# Altium PCB Buck_converter.PcbDoc
Units mil, origin at the board's own origin, x right, y up, seen from the top; angles counter-clockwise.
Board outline 6000 x 3035 mil, 4 copper layers (Top Layer, Ground, Layer 2, Bottom Layer), stack 23.756 mil thick; 43 components, 22 nets, 133 pads, 33 vias.
Unrouted connection lines stored in the file: 5.
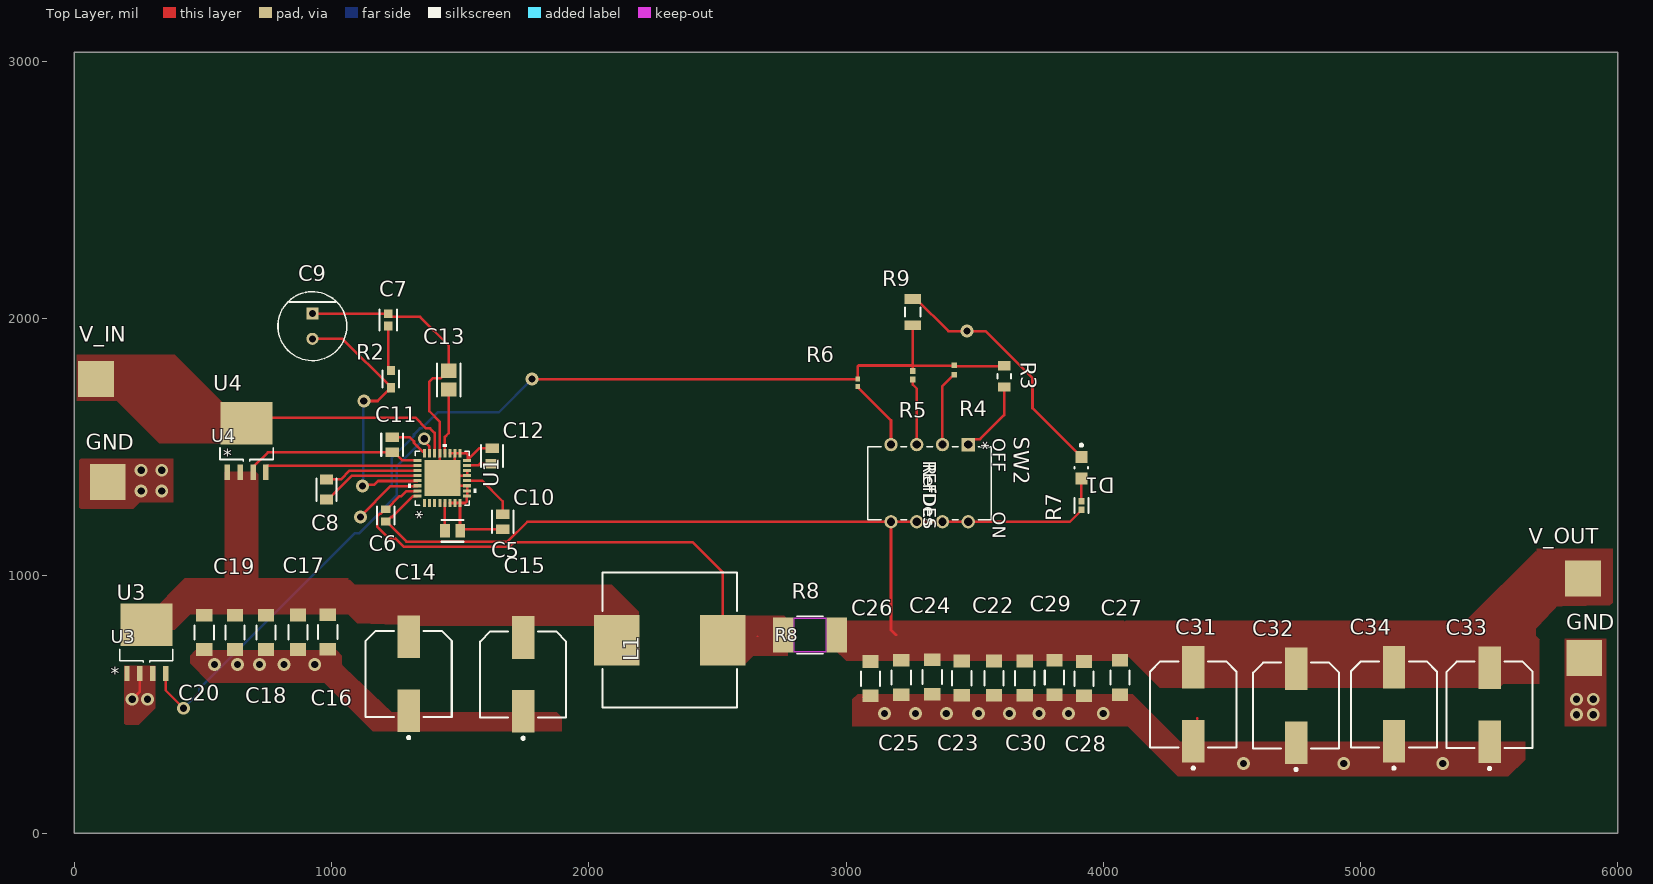
[diagram p0: Top Layer view]
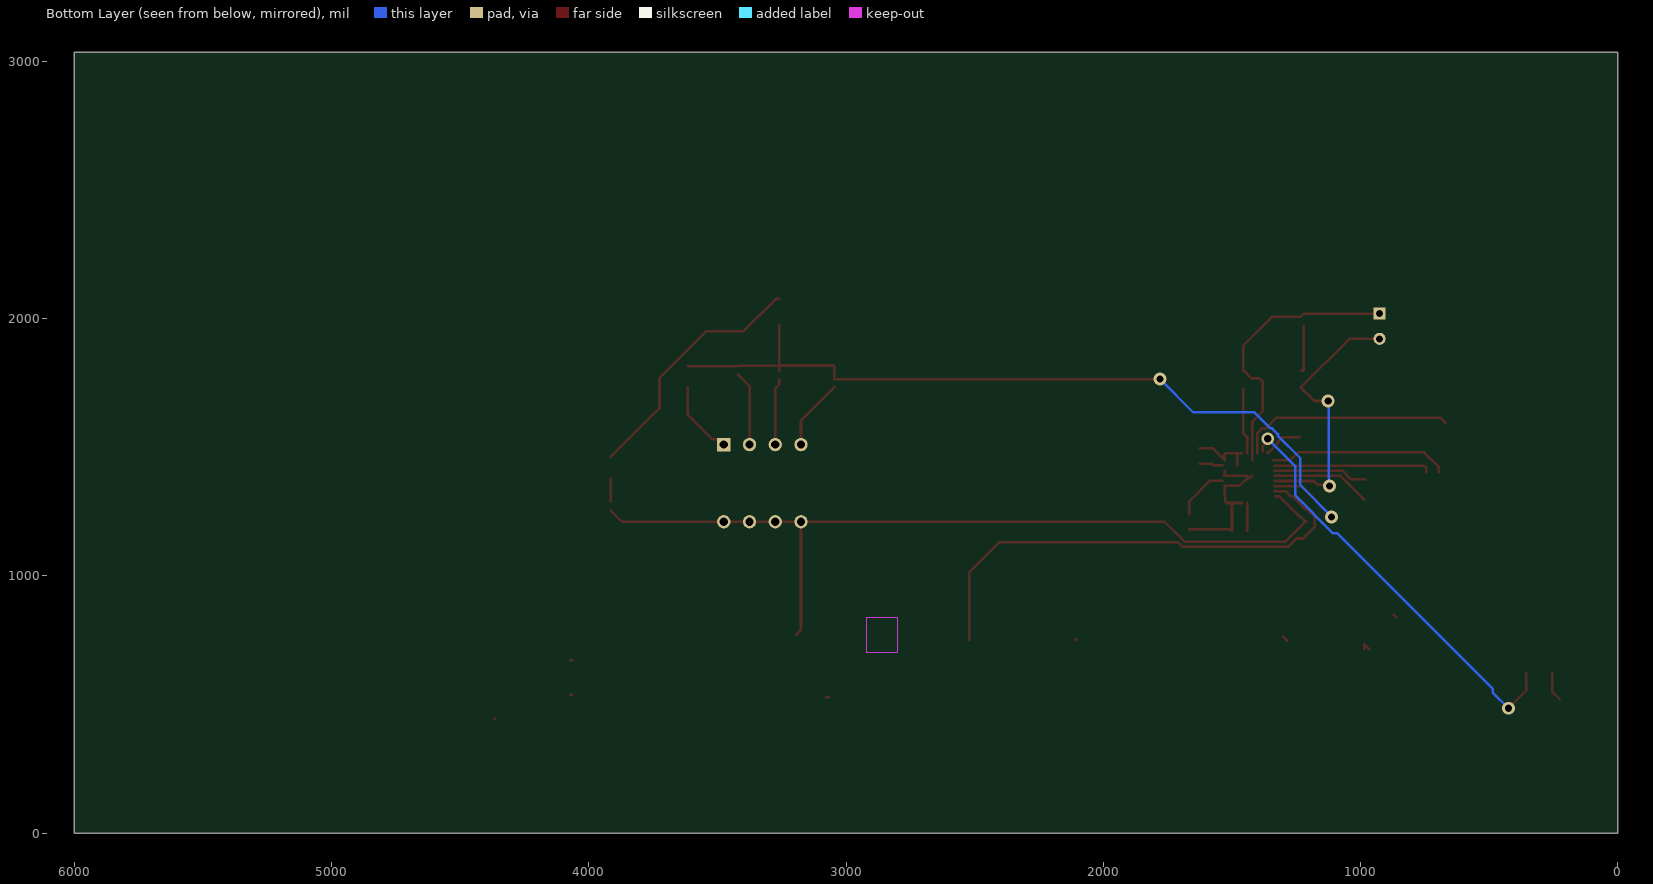
[diagram p1: Bottom Layer view, seen from below]
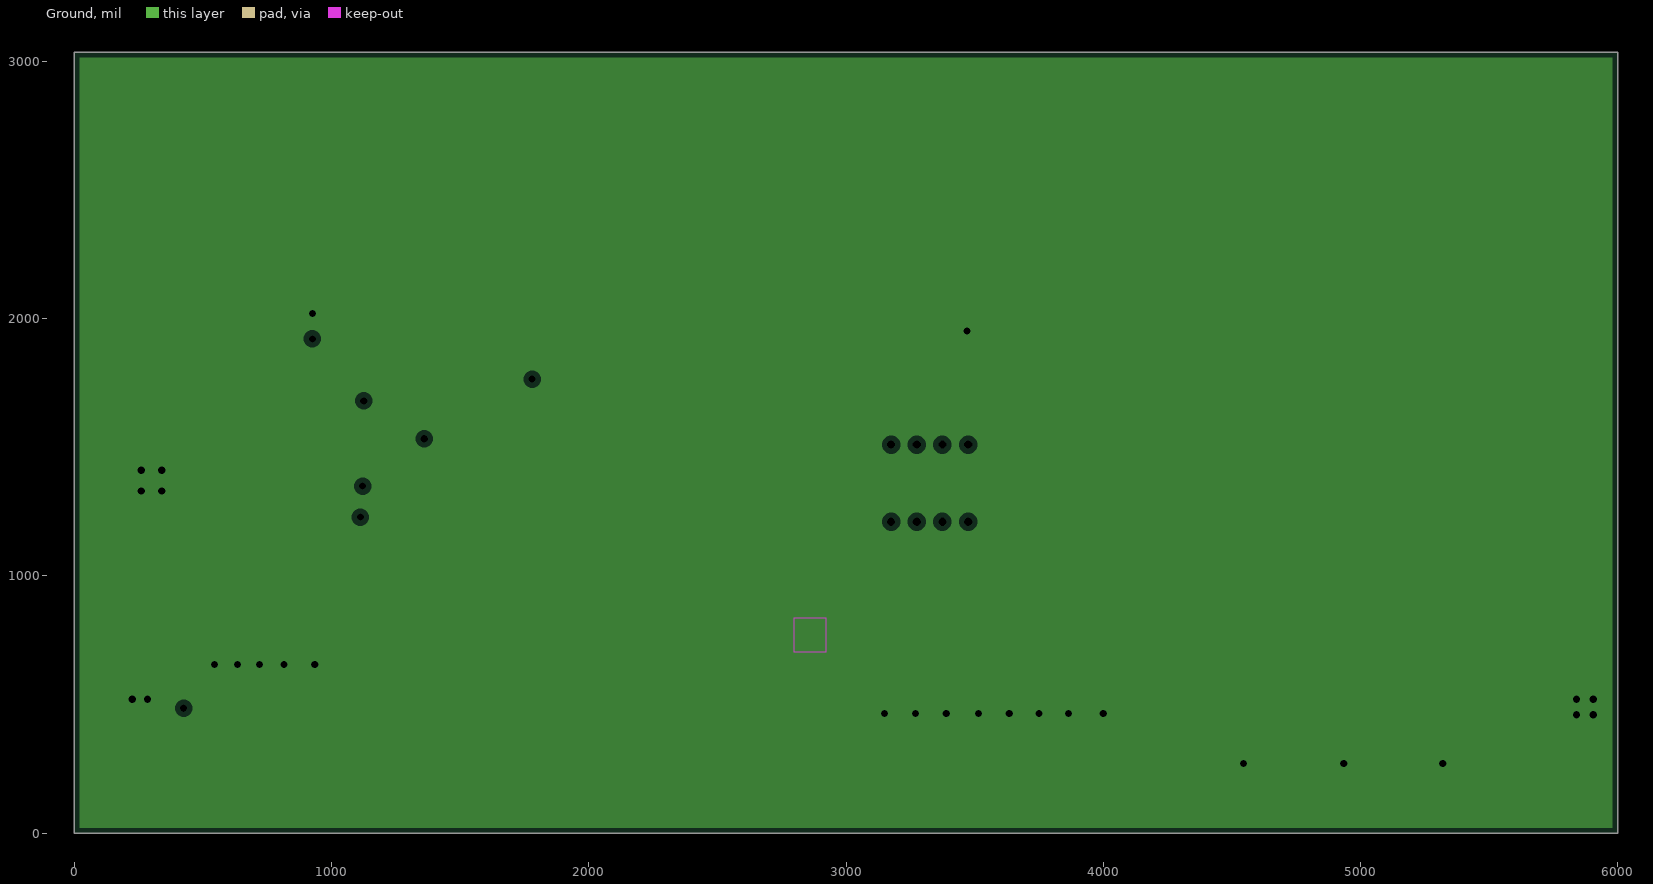
[diagram p2: Ground, clearances drawn from the general rule]
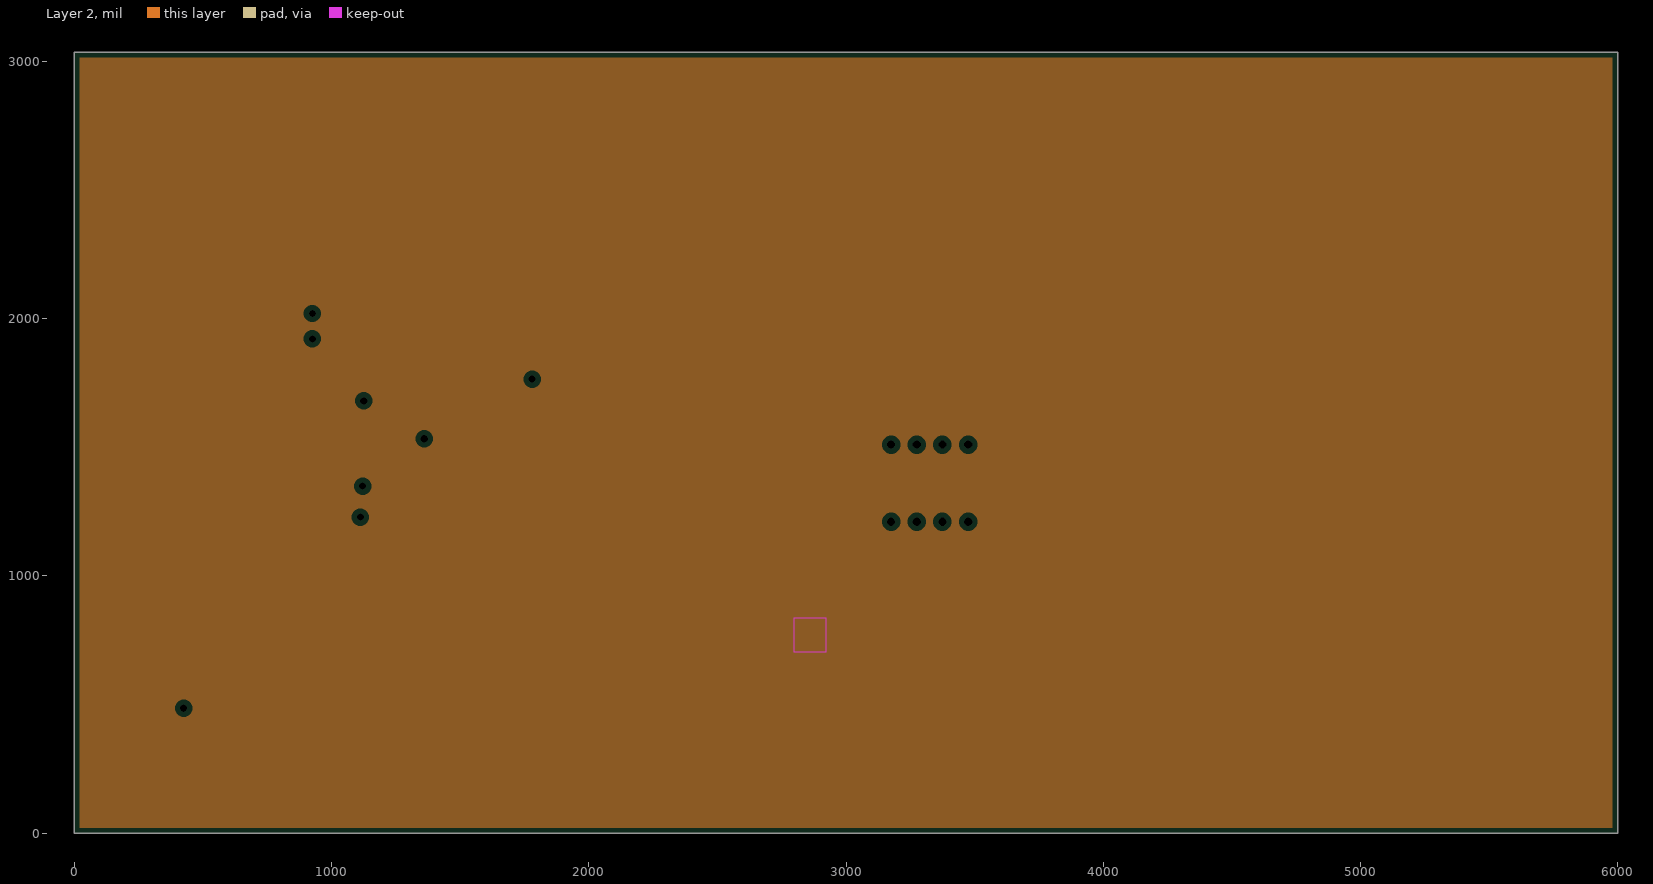
[diagram p3: Layer 2, clearances drawn from the general rule]
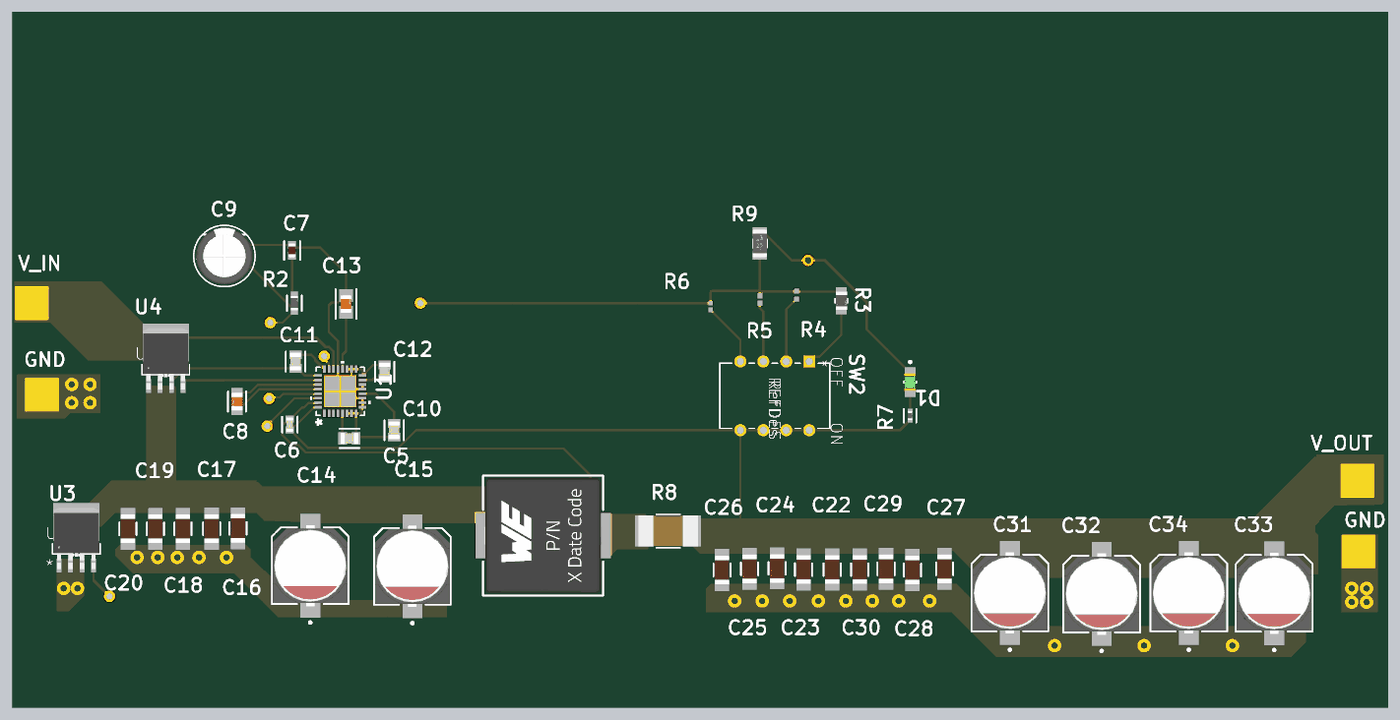
[diagram p4: 3D render of the assembled board from above, using the file's embedded part models]

## Layer stack, top to bottom
Top Solder: solder mask 0.4, Solder Resist, Dk 3.5
Top Layer: signal copper 1.4
Dielectric 2: prepreg 2.8, PP-006, Dk 4.1
Ground: plane copper 1.378, net GND
Dielectric 1: dielectric 12.6, FR-4, Dk 4.8
Layer 2: plane copper 1.378
Dielectric 3: prepreg 2.8, PP-006, Dk 4.1
Bottom Layer: signal copper 1.4
Bottom Solder: solder mask 0.4, Solder Resist, Dk 3.5

## Board outline
0,0 6000,0 6000,3035 0,3035

## Design rules (kind name [scope] priority, off if disabled: settings)
Clearance [All] p1: gap=10 ignorepadtopadclearanceinfootprint=FALSE
PlaneClearance [All] p1: clearance=20
PlaneConnect [All] p1: planeconnectstyle=Relief reliefexpansion=20 reliefentries=4 reliefconductorwidth=10 reliefairgap=10
PolygonConnect [All] p1: connectstyle=Direct reliefconductorwidth=10 reliefentries=4 polygonreliefangle="90 Angle" airgapwidth=10
RoutingVias [All] p1: holewidth=28 width=50 viastyle="Through Hole" minholewidth=28 minwidth=50 maxholewidth=28 maxwidth=50
SolderMaskExpansion [All] p1: expansion=4 istentingtop=FALSE
SupplyNets "Schematic Supply Nets" [InNet('GND')] p1: voltage=0.000
Width [All] p1: maxlimit=10 minlimit=10 preferedwidth=10
28 further rules are at their usual default settings.

## Components (designator, comment, footprint, x,y, rotation, side; value= is the part's Value field where it differs from the comment)
C5 "C0805C104K5RACTU" FP-C0805C-DN-MFG 1470.63,1174.53 r180 top value="0.10 μF"
C6 "C0603C102F4GACTU" FP-C0603C-CF-MFG 1210.63,1234.53 r90 top value="1,000 pF"
C7 "TMK107ABJ225MA-T" FP-0603-L_1_6_0_15-W_0_8-IPC_C 1220.63,1994.53 r90 top
C8 "08051C224K4T2A" FP-0805-L_2_01_0_2-W_1_25-MFG 980.63,1335.16 r270 top
C9 "ECA1EHG101I" FP-RAD-TH-D_6_3_0_5-L_11-MFG 925.63,1970.32 r270 top
C10 "C0805C104K5RACTU" FP-C0805C-DN-MFG 1665.63,1210 r90 top value="0.10 μF"
C11 "C0805C104K5RACTU" FP-C0805C-DN-MFG 1235.63,1509.53 r90 top value="0.10 μF"
C12 "C0805C104K5RACTU" FP-C0805C-DN-MFG 1624.28,1465.61 r270 top value="0.10 μF"
C13 "GRM21BC8YA475ME51L" FP-GRM21B-0_15-IPC_A 1455.63,1760.99 r90 top
C14 "A768KS337M1ELAE019" FP-A768KS337M1ELAE019-MFG 1300,618.7 r90 top
C15 "A768KS337M1ELAE019" FP-A768KS337M1ELAE019-MFG 1745,616.3 r90 top
C16 "TMK316BBJ226ML-T" FP-1206-L_3_2_0_3-W_1_6_0-MFG 985,781.93 r270 top
C17 "TMK316BBJ226ML-T" FP-1206-L_3_2_0_3-W_1_6_0-MFG 870,780.55 r270 top
C18 "TMK316BBJ226ML-T" FP-1206-L_3_2_0_3-W_1_6_0-MFG 745,780 r270 top
C19 "TMK316BBJ226ML-T" FP-1206-L_3_2_0_3-W_1_6_0-MFG 625,780 r270 top
C20 "TMK316BBJ226ML-T" FP-1206-L_3_2_0_3-W_1_6_0-MFG 505,780 r270 top
C22 "TMK316BBJ226ML-T" FP-1206-L_3_2_0_3-W_1_6_0-MFG 3575,601.93 r270 top
C23 "TMK316BBJ226ML-T" FP-1206-L_3_2_0_3-W_1_6_0-MFG 3450,601.93 r270 top
C24 "TMK316BBJ226ML-T" FP-1206-L_3_2_0_3-W_1_6_0-MFG 3335,606.93 r270 top
C25 "TMK316BBJ226ML-T" FP-1206-L_3_2_0_3-W_1_6_0-MFG 3215,605 r270 top
C26 "TMK316BBJ226ML-T" FP-1206-L_3_2_0_3-W_1_6_0-MFG 3095,600 r270 top
C27 "TMK316BBJ226ML-T" FP-1206-L_3_2_0_3-W_1_6_0-MFG 4065,605 r270 top
C28 "TMK316BBJ226ML-T" FP-1206-L_3_2_0_3-W_1_6_0-MFG 3925,600 r270 top
C29 "TMK316BBJ226ML-T" FP-1206-L_3_2_0_3-W_1_6_0-MFG 3810,605 r270 top
C30 "TMK316BBJ226ML-T" FP-1206-L_3_2_0_3-W_1_6_0-MFG 3695,601.93 r270 top
C31 "A768KS337M1ELAE019" FP-A768KS337M1ELAE019-MFG 4350,500 r90 top
C32 "A768KS337M1ELAE019" FP-A768KS337M1ELAE019-MFG 4750,495 r90 top
C33 "A768KS337M1ELAE019" FP-A768KS337M1ELAE019-MFG 5502.2,498.69 r90 top
C34 "A768KS337M1ELAE019" FP-A768KS337M1ELAE019-MFG 5130,500 r90 top
D1 "LTST-C170GKT" FP-LTST-C170GKT-MFG 3915,1420 r270 top
L1 "7443551130" WE-HCI_1365 2315,750 r90 top
R2 "AC0603JR-077K5L" FP-AC0603-MFG 1230.63,1764.53 r90 top
R3 "RT0805FRE0749K9L" FP-RT0805-MFG 3615,1775 r270 top value=49.9KΩ
R4 "CRCW040264K9FKED" RESC1005X40X25NL05T05 3420,1800 r270 top
R5 "RC0402FR-0795K3L" RESC1005X40X25NL05T10 3260,1780 r270 top
R6 "RC0402FR-0782K5L" RESC1005X40X25LL05T10 3045,1750 r270 top
R7 "CRCW04022K20FKEDC" FP-CRCW0402-e3-IPC_B 3915,1273.22 r90 top
R8 "TLR3A20KR0025FTDG" RES_TLR3A20KR0025FTDG_TEC 2860,770 r0 top
R9 "CRGCQ1206F10K" FP-CRGCQ1206-IPC_C 3260,2025 r90 top value=10KΩ
SW2 "210-4MS" DIP8_210-4_CTS 3475,1510 r270 top
U1 "LTC3892EUH-2#TRPBF" QFN-32_UH 1430.63,1379.53 r90 top
U3 "SQJ200EP-T1_GE3" TO_200EP-T1_GE3_VIS 280,762 r0 top
U4 "SQJ200EP-T1_GE3" TO_200EP-T1_GE3_VIS 670,1545 r0 top

## Footprints (in the part's own frame and the unit in brackets; to place one, negate y for a bottom-side part, rotate by r counter-clockwise, add the part's x,y. Pads: shape width x height; smd on the part's side, far side on the other; paste and mask are expansions set on the pad)
DIP8_210-4_CTS [mil]
  rect 52x52 / inner round 60 / far side rect 52x52 hole 32 paste-99999 mask+0: 1(0,0)
  round 52 / inner round 60 / far side round 52 hole 32 paste-99999 mask+0: 2(0,-100) 3(0,-200) 4(0,-300) 5(300,-300) 6(300,-200) 7(300,-100) 8(300,0)
  silkscreen extent 8,-390 292,90
FP-0603-L_1_6_0_15-W_0_8-IPC_C [mil]
  rect 33.77x33.94 smd paste+0 mask+0: 1(-23.71,0) 2(23.71,0)
  silkscreen extent -41,-34 41,34, body extent -45,-23 45,23, height 10
FP-0805-L_2_01_0_2-W_1_25-MFG [mm]
  rect 1x1.25 smd paste+0 mask+0: 1(-1,0) 2(1,0)
  silkscreen extent -1.1,-1 1.1,1, body extent -1.6,-0.82 1.6,0.82, height 0.25
FP-1206-L_3_2_0_3-W_1_6_0-MFG [mm]
  rect 1.25x1.6 smd paste+0 mask+0: 1(-1.7,0) 2(1.7,0)
  silkscreen extent -0.7,-0.95 0.7,0.95, body extent -2.42,-1.05 2.42,1.05, height 0.25
FP-A768KS337M1ELAE019-MFG [mm]
  rect 4.2x2.2 smd paste+0 mask+0: 1(-3.65,0) 2(3.65,0)
  silkscreen extent -6.42,-4.25 4.25,4.25, body extent -6,-4.5 6,4.5, height 0.25
FP-AC0603-MFG [mm]
  rect 0.9x0.8 smd paste+0 mask+0: 1(-0.85,0) 2(0.85,0)
  silkscreen extent -0.85,-0.82 0.85,0.82, body extent -1.4,-0.55 1.4,0.55, height 0.25
FP-C0603C-CF-MFG [mm]
  rect 0.75x0.9 smd paste+0 mask+0: 1(-0.6,0) 2(0.6,0)
  silkscreen extent -0.87,-0.85 0.88,0.85, body extent -1.2,-0.6 1.2,0.6, height 0.25
FP-C0805C-DN-MFG [mm]
  rect 0.95x1.35 smd paste+0 mask+0: 1(-0.75,0) 2(0.75,0)
  silkscreen extent -1.1,-1.07 1.1,1.07, body extent -1.4,-0.85 1.4,0.85, height 0.25
FP-CRCW0402-e3-IPC_B [mil]
  rect 25.97x22.54 smd paste+0 mask+0: 1(-16.78,0) 2(16.78,0)
  silkscreen extent -30,-27 30,27, body extent -36,-17 36,17, height 10
FP-CRGCQ1206-IPC_C [mil]
  rect 37.64x63.38 smd paste+0 mask+0: 1(-51.22,0) 2(51.22,0)
  silkscreen extent -18,-31 18,31, body extent -74,-37 74,37, height 10
FP-GRM21B-0_15-IPC_A [mil]
  rect 55.34x59.38 smd paste+0 mask+0: 1(-36.47,0) 2(36.47,0)
  silkscreen extent -64,-45 64,45, body extent -84,-49 84,49, height 10
FP-LTST-C170GKT-MFG [mm]
  rect 1.2x1.2 smd paste+0 mask+0: 1(-1.05,0) 2(1.05,0)
  silkscreen extent -2.35,-0.67 0.08,0.67, body extent -1.75,-0.77 1.75,0.77, height 0.25
FP-RAD-TH-D_6_3_0_5-L_11-MFG [mm]
  rect 1.2x1.2 hole 0.7 paste-2539.97 mask+0: 1(-1.25,0)
  round 1.2 hole 0.7 paste-2539.97 mask+0: 2(1.25,0)
  silkscreen extent -3.4,-3.4 3.4,3.4, body extent -3.5,-3.5 3.5,3.5, height 0.25
FP-RT0805-MFG [mm]
  rect 0.9x1.2 smd paste+0 mask+0: 1(-1.05,0) 2(1.05,0)
  silkscreen extent -0.23,-0.67 0.23,0.67, body extent -1.6,-0.77 1.6,0.77, height 0.25
QFN-32_UH [mm]
  rect 0.805x0.3 smd: 1(-2.452,1.75) 2(-2.452,1.25) 3(-2.452,0.75) 4(-2.452,0.25) 5(-2.452,-0.25) 6(-2.452,-0.75) 7(-2.452,-1.25) 8(-2.452,-1.75) 17(2.452,-1.75) 18(2.452,-1.25) 19(2.452,-0.75) 20(2.452,-0.25) 21(2.452,0.25) 22(2.452,0.75) 23(2.452,1.25) 24(2.452,1.75)
  rect 0.3x0.805 smd: 9(-1.75,-2.452) 10(-1.25,-2.452) 11(-0.75,-2.452) 12(-0.25,-2.452) 13(0.25,-2.452) 14(0.75,-2.452) 15(1.25,-2.452) 16(1.75,-2.452) 25(1.75,2.452) 26(1.25,2.452) 27(0.75,2.452) 28(0.25,2.452) 29(-0.25,2.452) 30(-0.75,2.452) 31(-1.25,2.452) 32(-1.75,2.452)
  rect 3.55x3.55 smd paste-3: 33(0,0)
  silkscreen extent -2.67,-3.36 3.36,3.36
RES_TLR3A20KR0025FTDG_TEC [mil]
  rect 80x135 smd paste+0 mask+0: 1(-104,0) 2(104,0)
  Top Layer keep-out region: -62,-65.5 -62,65.5 62,65.5 62,-65.5
  Keep-Out Layer region: -62,-67.5 -62,67.5 62,67.5 62,-67.5
  silkscreen extent -52,-72 52,72, body extent -130,-67 130,67, height 33
RESC1005X40X25LL05T10 [mm] "Chip Resistor, 2-Leads, Body 1.00x0.50mm, IPC High Density"
  rect 0.5x0.45 smd: 1(-0.375,0) 2(0.375,0)
  body extent -0.53,-0.27 0.53,0.28, height 0.4
RESC1005X40X25NL05T05 [mm] "Chip Resistor, 2-Leads, Body 1.00x0.50mm, IPC Medium Density"
  rect 0.55x0.55 smd: 1(-0.45,0) 2(0.45,0)
  body extent -0.53,-0.27 0.53,0.28, height 0.4
RESC1005X40X25NL05T10 [mm] "Chip Resistor, 2-Leads, Body 1.00x0.50mm, IPC Medium Density"
  rect 0.6x0.55 smd: 1(-0.425,0) 2(0.425,0)
  body extent -0.53,-0.27 0.53,0.28, height 0.4
TO_200EP-T1_GE3_VIS [mil]
  rect 21x60 smd paste+0 mask+0: 1(-75,-142) 2(-25,-142) 3(25,-142) 4(75,-142)
  rect 202x166 smd paste+0 mask+0: 5(0,48)
  silkscreen extent -104,-99 104,-48, body extent -100,-158 100,110, height 45
WE-HCI_1365 [mm] "SMT Flat Wire High Current Inductor, body 12.8x12.8mm"
  rect 5x4.5 smd: 1(0,5.25) 2(0,-5.25)
  silkscreen extent -6.65,-6.65 6.65,6.65, body extent -6.4,-6.5 6.4,6.5, height 6.2

## Part data
C5 C10 C11 C12: library part CMP-2007-00279-2, "CAP CER 0.1UF 50V X7R 0805", Capacitance="0.10 μF", Manufacturer=KEMET, Package=C0805C-DN, Temperature="-55°C to +125°C", Temperature Characteristic=X7R, Temperature Coefficient=30ppm/°C, Temperature Range High=+125°C, Temperature Range Low=-55°C, Tolerance=0.1, Voltage Rating="50 V", Automotive=No, Category=Cap, ComponentLink2Description=Datasheet, ComponentLink2URL=https://content.kemet.com/datasheets/KEM_C1003_C0G_SMD.pdf, Device Class L1="Passive Components", Device Class L2=Capacitors, Device Class L3="Ceramic Capacitors", Digikey Description="CAP CER 0.1UF 50V X7R 0805", Height=0.88mm, Ipc Land Pattern Name=CAPC200125X78, Lead Free=Yes, Manufacturer Part Number=C0805C104K5RACTU, Material=Ceramic, Mouser Description="Cap Ceramic 0.1uF 50V X7R 10% SMD 2.0 x 1.2 mm 125 C Paper T/R", Octopart=https://octopart.com/c0805c104k5ractu-kemet-143926, RoHS=TRUE
C6: library part CMP-03020-016183-1, "CAP CER 1000PF 16V NP0 0603", Capacitance="1,000 pF", Manufacturer=KEMET, Package=C0603C-CF, Temperature="-55°C to +125°C", Temperature Characteristic=C0G, Temperature Coefficient=30ppm/°C, Temperature Range High=+125°C, Temperature Range Low=-55°C, Tolerance=0.01, Voltage Rating="16 V", Automotive=Yes, Automotive Grade="Grade 1", Category=Cap, ComponentLink2Description=Datasheet, ComponentLink2URL=https://api.kemet.com/component-edge/download/datasheet/C0603C100J5GACAUTO.pdf, Device Class L1="Passive Components", Device Class L2=Capacitors, Device Class L3="Ceramic Capacitors", Digikey Description="CAP CER 1000PF 16V NP0 0603", Height=0.87mm, Lead Free=Yes, Manufacturer Part Number=C0603C102F4GACTU, Material=Ceramic, Mouser Description="Capacitor, Ceramic, 1Nf, 16Vdc, 1-% Tol, 1+% Tol, C0g-Tc Code, -30, 30Ppm-Tc Rohs Compliant: Yes", Octopart=https://octopart.com/c0603c102f4gactu-kemet-17138174, RoHS=TRUE
C7: library part CMP-14477-002773-2, "None", Capacitance=2.2uF, Case/Package=0603, Dielectric=X5R, Max Operating Temperature=85°C, Min Operating Temperature=-55°C, Tolerance=20%, Voltage=25V, Depth=0.8mm, Height=0.8mm, Lead Free="Lead Free", Length=1.6mm, Mount="Surface Mount", RoHS Compliant=Yes
C8: library part CMP-04427-012849-1, "Automotive Ceramic Capacitor, 0805, 220nF, 10%, X7R, 15%, 100V", Capacitance=220nF, Case/Package=0805, Dielectric=X7R, Max Operating Temperature=125°C, Min Operating Temperature=-55°C, Tolerance=10%, Voltage Rating (DC)=100V, Contact Plating=Tin, Length=2.01mm, Mount="Surface Mount", RoHS Compliant=Yes, Termination=Wraparound
C9: library part CMP-05427-000141-1, "Aluminum Electrolytic Capacitors (Radial Lead Type) AEC-Q200 Qualified 100uF ±20% 25V", Capacitance=100uF, Case/Package=Radial, Max Operating Temperature=105°C, Min Operating Temperature=-55°C, Package Quantity=2000, Ripple Current=130mA, Tolerance=20%, Voltage Rating=25V, Construction=RADIAL, Contact Plating=Tin, Diameter=6.3mm, Height=11.2mm, Height - Seated (Max)=0.48inch, Lead Diameter=0.5mm, Lead Pitch=2.5mm, Lead/Base Style=Straight, Length=11.2mm, Life (Hours)=1000Hour, Mount="Through Hole", Packaging="Ammo Pack", Radiation Hardening=No, RoHS Compliant=Yes, Series=NHG, Termination=Radial, Voltage Rating (DC)=25V, Width=6.3mm
C13: library part CMP-06035-033280-1, "Chip Multilayer Ceramic Capacitors for General Purpose, 0805, 4.7uF, X6S, 22%, 20%, 35V", Capacitance=4.7uF, Case/Package=0805, Dielectric=X6S, Tolerance=20%, Voltage Rating (DC)=35V, Length=2mm, Thickness=1.25mm, Width=1.25mm
C14 C15 C31 C32 C33 C34: library part CMP-03016-000043-1, "CAP ALUM POLY 330UF 20% 25V SMD"
C16 C17 C18 C19 C20 C22 C23 C24 C25 C26 C27 C28 C29 C30: library part CMP-14477-000100-2, "None", Capacitance=22uF, Case Code (Imperial)=1206, Case Code (Metric)=3216, Dielectric=X5R, Max Operating Temperature=85°C, Min Operating Temperature=-55°C, Package Quantity=2000, Resistor Type=Ceramic, Tolerance=20%, Voltage Rating=25V, Case/Package=1206, Construction=Flat, Halogen Free="Halogen Free", Height=1.6mm, Length=3.2mm, Mount="Surface Mount", Packaging="Tape and Reel", RoHS Compliant=Yes, Series=M, Termination=SMD/SMT, Thickness=0.075inch, Voltage Rating (DC)=25V, Weight=0.000571oz, Width=0.063inch
D1: library part CMP-1674-00002-6, "LED GREEN CLEAR SMD", Case Code (Imperial)=0805, Case Code (Metric)=2012, Color=Green, Forward Current=30mA, Forward Voltage=2.1V, Lens Color=Colorless, Max Operating Temperature=85°C, Min Operating Temperature=-55°C, Package Quantity=1, Power Dissipation=100mW, Reverse Voltage=5V, Test Current=10mA, Case/Package=0805, Depth=1.25mm, Dominant Wavelength=569nm, Height=1.1mm, Illumination Color=Green, Lead Free="Lead Free", Length=2mm, Lens Style=Diffused, Lens Transparency=Clear, Luminous Intensity=6mcd, Mount="Surface Mount", Number of Elements=1, Number of LEDs=1, Number of Pins=2, Packaging="Tape and Reel", Power Rating=100mW, Radiation Hardening=No, Viewing Angle=130°, Voltage=5V, Wavelength=565nm, Width=1.25mm
L1: library part CMP-0226-00036-3, "Power Choke Shielded Wirewound 1.3uH/0.9uH 20% 100KHz 25A 1.8mOhm DCR T/R", Ambient Temperature Range High=105°C, Ambient Temperature Range Low=-40°C, Case/Package=Nonstandard, Current Rating=25A, DC Resistance (DCR)=1.8mΩ, Inductance=1.3µH, Inductance Tolerance=20%, Max Operating Temperature=155°C, Saturation Current=11A, Self Resonant Frequency=59MHz, Test Frequency=100kHz, Composition=Wirewound, Height=6.2mm, Height - Seated (Max)=6.5024mm, Length=13.2mm, Max DC Current=25A, Min Operating Temperature=-40°C, Mount="Surface Mount", Number of Pins=2, REACH SVHC=Unknown, Resistance=1.8mΩ, RMS Current (Irms)=25A, RoHS=Compliant, Series Resistance=1.8mΩ, Shielding=Shielded, Termination=SMD/SMT, Tolerance=20%, Width=12.8mm
R2: library part CMP-03412-046506-1, "RES 7.5kΩ 5.00% 0.1W 0603", Case Code (Imperial)=0603, Case Code (Metric)=1608, Max Operating Temperature=155°C, Max Power Dissipation=100mW, Min Operating Temperature=-55°C, Resistance=7.5kR, Resistor Type="Thick Film", Temperature Coefficient=100ppm/°C, Tolerance=5%, Voltage Rating=50V, Case/Package=0603, Features="Moisture Resistant", Height=0.022inch, Length=0.063inch, Number of Terminations=2, Packaging="Tape and Reel", Power Rating=100mW, RoHS Compliant=Yes, Series=AC, Termination=SMD/SMT, Width=0.8mm
R3: library part CMP-2001-01585-2, "RES SMD 49.9K OHM 1% 1/8W 0805", Manufacturer=Yageo, Package=RT0805, Power Rating=0.125W, Resistance=49.9KΩ, Temperature="-55°C to +155°C", Temperature Coefficient="50 ppm/°C", Temperature Range High=+155°C, Temperature Range Low=-55°C, Tolerance=0.0001, Voltage Rating=150V, Automotive=No, Category=Res, ComponentLink2Description=Datasheet, ComponentLink2URL=http://www.yageo.com/documents/recent/PYu-RT_1-to-0.01_RoHS_L_9.pdf, Composition="Thin Film", Device Class L1="Passive Components", Device Class L2=Resistors, Device Class L3="Chip SMD Resistors", Digikey Description="RES SMD 49.9K OHM 1% 1/8W 0805", Footprint Url=http://www.yageo.com/exep/pages/download/literatures/PYu-R_Mount_10.pdf, Height=0.6mm, Ipc Land Pattern Name=RESC200125X50, Lead Free=Yes, Manufacturer Part Number=RT0805FRE0749K9L, Mouser Description="Thin Film Resistors - SMD 1/8W 49.9K ohm 1% 50ppm", Octopart=https://octopart.com/rt0805fre0749k9l-yageo-1391654, RoHS=TRUE, Series=RT
R4: library part CMP-2002-00158-1, Manufacturer="Vishay Dale", Part Number=CRCW040264K9FKED
R5: library part CMP-2002-07843-1, Manufacturer="Yageo / Phycomp", Part Number=RC0402FR-0795K3L
R6: library part CMP-2002-07817-1, Manufacturer="Yageo / Phycomp", Part Number=RC0402FR-0782K5L
R7: library part CMP-02407-013149-1, "RES 2.2K OHM 1% 1/16W 0402", Case Code (Imperial)=0402, Case Code (Metric)=1005, Max Operating Temperature=155°C, Max Power Dissipation=63mW, Min Operating Temperature=-55°C, Power Rating=62.5mW, Resistance=2.2kR, Resistor Type="Thick Film", Temperature Coefficient=100ppm/°C, Tolerance=1%, Case/Package=0402, Contact Plating=Tin, Lead Free="Lead Free", Length=1mm, Mount="Surface Mount", Number of Terminations=2, Packaging="Cut Tape", RoHS Compliant=Yes, Series=CRCW-C, Termination=Wraparound
R8: library part CMP-009-00177-1, "TLR 2512 2.0W R0025 1% 150PPM 2K RL", Manufacturer_Name="TE Connectivity", Copyright="Copyright (C) 2025 Ultra Librarian. All rights reserved.", Design Item ID=TLR3A20KR0025FTDG, Manufacturer_Part_Number=TLR3A20KR0025FTDG, Source=TLR3A20KR0025FTDG.SchLib, Type="Chip Resistor - Surface Mount"
R9: library part CMP-03211-010884-1, "CRGCQ1206 10KΩ 0.25W 1% ±100ppm/°C 200V", Ambient Temperature Range High=+70°C, Manufacturer="TE Connectivity", Package=CRGCQ1206, Power Rating=0.25W, Resistance=10KΩ, Temperature="-55°C to +155°C", Temperature Coefficient=±100ppm/°C, Temperature Range High=+155°C, Temperature Range Low=-55°C, Tolerance=0.01, Voltage Rating=200V, Automotive=Yes, Automotive Grade="Grade 913", Category=Res, ComponentLink2Description=Datasheet, ComponentLink2URL=https://www.te.com/commerce/DocumentDelivery/DDEController?Action=showdoc&DocId=Data+Sheet%7F1773204-3%7F1%7Fpdf%7FEnglish%7FENG_DS_1773204-3_1.pdf%7F4-2176347-922, Composition="Thick Film", Device Class L1="Passive Components", Device Class L2=Resistors, Device Class L3="Chip SMD Resistors", Height=0.65mm, Ipc Land Pattern Name=RESC310155X55, Lead Free=Yes, Manufacturer Part Number=CRGCQ1206F10K, Octopart=https://octopart.com/crgcq1206f10k-te+connectivity-91018244, RoHS=TRUE, Series=CRGCQ
SW2: library part CMP-011-00013-1, "Description", Manufacturer_Name="CTS Components", Copyright="Copyright (C) 2025 Ultra Librarian. All rights reserved.", Design Item ID=210-4MS, Manufacturer_Part_Number=210-4MS, RefDes=RefDes, Source=210-4MS.SchLib, Type="DIP Switches"
U1: library part CMP-009-000000-1, Package=None, Availability=Unavailable, Component Type=Standard, Design Item ID=LTC3892EUH-2#TRPBF, MF="{'manufacturer': u'Analog Devices Inc.'}", MP=LTC3892EUH-2#TRPBF, Pin Count=33, Price=None, Source=LTC3892EUH-2#TRPBF.SchLib
U3 U4: library part CMP-012-000000-1, "DUAL N-CHANNEL 20-V (D-S) 175C MOSFET", Manufacturer_Name=Vishay, Copyright="Copyright (C) 2026 Ultra Librarian. All rights reserved.", Datasheet=https://www.vishay.com/doc?67774, Design Item ID=SQJ200EP-T1_GE3, Manufacturer_Part_Number=SQJ200EP-T1_GE3, Source=SQJ200EP-T1_GE3.SchLib

## Free pads (board coordinates)
  rect 139.76x139.76 smd paste-118.11: 4(130,1365) 5(85,1765) 8(5870,680) 9(5865,990)

## Via types
v1: diameter 50, hole 28, Top Layer to Ground, 27 vias
v2: diameter 50, hole 28, Top Layer to Bottom Layer, 6 vias

## Nets (pads, with @x,y where several pads share a name; then routed paths per layer and width w, separated by ;. In a path a pad name is that pad's centre, name@x,y a point inside that pad or via, vN(x,y) a via of type N, cw(c..) or ccw(c..) an arc to the next point about the centre after c; other vN are vias at no path point)
GND: C5.1 C7.2 C8.2 C9.1 C10.1 C12.1 C13.2 C14.1 C15.1 C16.2 C17.2 C18.2 C19.2 C20.2 C22.2 C23.2 C24.2 C25.2 C26.2 C27.2 C28.2 C29.2 C30.2 C31.1 C32.1 C33.1 C34.1 D1.1 pad.4 pad.8 R9.2 U1.4 U1.6 U1.7 U1.8 U1.9 U1.10 U1.11 U1.13 U1.14 U1.16 U1.17 U1.18 U1.19 U1.21 U1.28 U1.33 U3.1 U3.2 U3.3 | length 3525
  Top Layer w10: v1(225,520) 255,550 U3.2 ; C9.1 926.92,2018.24 C7.2 1232.51,2006.35 1343.81,2006.35 1455.63,1894.53 C13.2 1453.61,1797.46 1423.35,1767.2 1393.3,1767.2 1380.63,1754.53 1380.63,1639.53 1420.63,1599.53 1420.63,1451.56 ; C16.2@965.55,713.62 985,733.07 C16.2 ; C8.2@985.55,1295.79 1078.19,1388.43 U1.28@1334.08,1388.43 ; U1.33@1420.63,1389.53 U1.33 ; U1.33@1435.55,1384.45 1470,1350 U1.11 U1.10 U1.9 1526.54,1310.63 1525.63,1309.72 1525.63,1288.83 1519.77,1282.98 U1.8 ; U1.33@1440.47,1389.37 U1.13 ; U1.6 U1.7 U1.8 ; U1.19 U1.18 ; U1.33@1479.84,1428.74 U1.18 ; U1.14 1527.18,1394.04 U1.13@1530.63,1390.59 ; U1.16 1573.9,1495.14 C12.1 ; U1.16@1527.18,1449.65 1530.63,1453.09 1530.63,1470.22 1524.77,1476.08 U1.17 U1.18 ; C10.1 1506.1,1180.47 C5.1 1499.53,1175.16 U1.8 ; C26.2@3068.11,528.07 3075,528.07 C26.2@3076.93,526.14 ; R9.2 3272.87,2076.22 3397.76,1951.34 3542.55,1951.34 3725,1768.89 3725,1651.34 D1.1 ; C27.2 C27.2@4071.89,538.07 ; 4365,446.3 4366.31,444.99
  other v1: 4545,270 4935,270 5320,270 5840,460 5905,460 3150,465 3270,465 3390,465 3515,465 3635,465 3750,465 3865,465 4000,465 285,520 5840,520 5905,520 545,655 635,655 720,655 815,655 935,655 260,1330 340,1330 260,1410 340,1410 3470.16,1951.34
I_SENSE_P: C6.2 L1.2 R8.1 U1.31 | length 1929.7
  Top Layer w10: C6.2 1207.68,1258.15 1190.2,1240.67 1186.7,1240.67 1177.91,1231.88 1177.91,1189.93 1222.84,1145 1248.25,1145 1280.3,1112.95 1692.88,1112.95 1709.93,1130 2405,1130 2521.69,1013.31 L1.2 ; C6.2@1213.58,1258.15 1264.96,1309.53 1271.38,1309.53 1290.63,1328.78 U1.31@1334.08,1328.78
MOSFET_1: U1.26 U4.4 | length 611
  Top Layer w10: U4.4 745,1422.5 750.5,1428 924.78,1428 925.2,1428.43 U1.26@1334.08,1428.43
MOSFET_2: U1.23 U3.4 | length 1665.3
  Top Layer w10: U3.4 355,555 v2(425,485) ; v2(1360.63,1532.84) 1360.63,1522.01 1380.63,1502.01 U1.23@1380.63,1484.53
  Bottom Layer w10: v2(425,485) 485,545 485,560 1090,1165 1105.93,1165 1254.13,1313.2 1254.13,1426.34 v2(1360.63,1532.84)
NetC5_2: C5.2 U1.1 U1.2 U1.5 | length 108.7
  Top Layer w10: U1.5 1440.47,1175.16 C5.2
NetC7_1: C7.1 R2.2 | length 181.9
  Top Layer w10: C7.1 1220.63,1799.53 1222.17,1797.99 R2.2
NetC8_1: C8.1 U1.27 | length 367.5
  Top Layer w10: C8.1 1036.01,1374.53 1069.9,1408.43 U1.27@1334.08,1408.43
NetC9_2: C9.2 R2.1 U1.29 | length 1067.2
  Top Layer w10: C9.2 1042.56,1921.1 1230.63,1733.03 R2.1 1230.63,1729.09 1219.88,1718.35 1217.91,1718.35 1179.09,1679.53 v2(1125.63,1679.53) ; v2(1120.69,1348.43) 1125.75,1353.49 1165.69,1353.49 1180.63,1368.43 U1.29@1334.08,1368.43
  Bottom Layer w10: v2(1120.69,1348.43) 1123.16,1350.89 1123.16,1677.06 v2(1125.63,1679.53)
NetC10_2: C10.2 U1.12 | length 213.1
  Top Layer w10: U1.12@1535.63,1369.53 1585.63,1369.53 1665.63,1289.53 C10.2
NetC11_2: C11.2 U1.24 | length 158.6
  Top Layer w10: C11.2 1303.76,1539.06 1320.63,1522.18 1320.63,1516.27 1354.91,1481.98 1360.83,1481.98 1360.83,1476.98 U1.24
NetC12_2: C12.2 U1.15 | length 91.4
  Top Layer w10: U1.15@1535.63,1429.53 1570.63,1429.53 1577.19,1436.09 C12.2
NetC13_1: C13.1 U1.20 | length 254.7
  Top Layer w10: U1.20@1440.63,1476.08 1440.63,1539.53 1455.63,1554.53 C13.1
NetD1_2: D1.2 R7.2 | length 88.7
  Top Layer w10: R7.2 D1.2
NetR3_2: R3.2 SW2.1 | length 296.3
  Top Layer w10: SW2.1 3496,1531 3521,1531 3615,1625 R3.2
NetR4_2: R4.2 SW2.2 | length 290.9
  Top Layer w10: SW2.2 3375,1737.28 R4.2
NetR5_2: R5.2 SW2.3 | length 259.5
  Top Layer w10: R5.2 3260,1742.6 3275,1727.6 SW2.3
NetR6_2: R6.2 SW2.4 | length 279.1
  Top Layer w10: R6.2 3045,1734.25 3175,1604.25 SW2.4
V_BUCK: C11.1 C14.2 C15.2 C16.1 C17.1 C18.1 C19.1 C20.1 L1.1 U1.25 U3.5 U4.1 U4.2 U4.3 | length 738.1
  Top Layer w10: U4.3 695,1422.5 752.5,1480 C11.1 1243.5,1480 1275.08,1448.43 U1.25 U1.25@1339.08,1448.43 ; C17.1@861.93,839.41 C17.1 ; C14.2@1285.16,747.56 C14.2 ; L1.1@2104.61,753.7 L1.1
V_IN: pad.5 U1.22 U4.5 | length 843.3
  Top Layer w10: U4.5 691.53,1614.53 1325.63,1614.53 1367.32,1572.84 1383.11,1572.84 1400.63,1555.32 U1.22@1400.63,1476.08
V_LED: U1.3
VOUT: C6.1 C22.1 C23.1 C24.1 C25.1 C26.1 C27.1 C28.1 C29.1 C30.1 C31.2 C32.2 C33.2 C34.2 pad.9 R7.1 R8.2 SW2.5 SW2.6 SW2.7 SW2.8 U1.32 | length 3401.6
  Top Layer w10: C6.1 C6.1@1213.58,1210.91 ; U1.32@1330.63,1308.78 1315.63,1308.78 1235.24,1228.39 1231.06,1228.39 C6.1@1213.58,1210.91 ; 3195,770 3175,790 SW2.5 ; R7.1 3915,1254.72 3870.28,1210 SW2.8 SW2.7 SW2.6 SW2.5 ; C27.1 C27.1@4071.89,671.93 ; C6.1@1213.58,1210.91 1291.54,1132.95 1684.6,1132.95 1761.65,1210 SW2.5
VPROG: R3.1 R4.1 R5.1 R6.1 R9.1 U1.30 | length 3294.5
  Top Layer w10: v2(1112.26,1227.9) 1112.26,1231.16 1229.88,1348.78 1332.86,1348.78 U1.30 ; v2(1779.76,1764.76) R6.1 3045,1812.99 3049.41,1817.4 3260,1817.4 ; R5.1 3260,1817.4 ; R9.1 3260,1817.4 ; R3.1 3613.43,1814.76 3420,1814.76 3418.68,1816.08 3261.32,1816.08 3260,1817.4
  Bottom Layer w10: v2(1112.26,1227.9) 1112.26,1231.16 1234.13,1353.03 1234.13,1456.99 1320.63,1543.49 1320.63,1549.4 1344.06,1572.84 1349.98,1572.84 1412.14,1635 1650,1635 v2(1779.76,1764.76)

## Polygon pours and split planes (outlines as drawn)
VOUT on Top Layer "VOUT_L01_P065" (solid, pour order 65): 5810.25,931.6 5645.17,755.52 5675,845 5635,885 5640,890 5640,905
VOUT on Top Layer "VOUT_L01_P064" (solid, pour order 64): 5689.9,879.9 5681.22,871.22 5681.22,750.45 5606.77,824.9 5409.9,824.9 5689.9,1104.9
V_IN on Top Layer "V_IN_L01_P063" (solid, pour order 63): 580,1515 330,1515 165,1680 170,1685 170,1860 390,1860 580,1670
V_BUCK on Top Layer "V_BUCK_L01_P059" (solid, pour order 59): 585,1405 705,1405 715,1395 715,950 620,950 585,985
GND on Top Layer "GND_L01_P058" (solid, pour order 58): 255,1455 385,1455 385,1285 255,1285
GND on Top Layer "GND_L01_P056" (solid, pour order 56): 3025,520 3045,540 4115,540 4300,355 5640,355 5640,285 5575,220 4290,220 4095,415 3025,415
GND on Top Layer "GND_L01_P055" (solid, pour order 55): 1895,395 1160,395 960,595 1030,665 1050,645 1235,470 1875,470 1895,450
GND on Top Layer "GND_L01_P037" (solid, pour order 37): 5955,415 5955,755 5795,755 5795,415
VOUT on Top Layer "VOUT_L01_P053" (solid, pour order 53): 4390,825 5621.87,825 5696.32,750.55 5695,749.23 5695,580 5555,580 5540,565 4390,565
VOUT on Top Layer "VOUT_L01_P052" (solid, pour order 52): 4100,685 4220,565 4390,565 4390,825 4080,825
VOUT on Top Layer "VOUT_L01_P051" (solid, pour order 51): 4100,805 4100,685 4085,670 3000,670 2955,715 2955,825 4080,825 4095,810
no net on Top Layer "NONET_L01_P049" (solid, pour order 49): 2655,765 2655.96,764.04 2655.96,763.65
I_SENSE_P on Top Layer "I_SENSE_P_L01_P048" (solid, pour order 48): 2435,845 2759.5,845 2784,820.5 2784,689.5 2639.5,689.5 2605,655
GND on Top Layer "GND_L01_P041" (solid, pour order 41): 450,690 470,710 1020,710 1040,690 1040,655 970,585 525,585 450,660
V_BUCK on Top Layer "V_BUCK_L01_P047" (solid, pour order 47): 1260,810 1265,805 2025,805 2065,845 2195,845 2195,860 2090,965 1090,965 1065,990 1060,985 1060,850 1065,850 1100,815
V_BUCK on Top Layer "V_BUCK_L01_P043" (solid, pour order 43): 290.53,850.53 430,990 1065,990 1065,855 1060,850 450,850 390,790 287.5,790
GND on Top Layer "GND_L01_P039" (solid, pour order 39): 195,650 315,650 315,485 250,420 200,420 195,425 195,500
VOUT on Top Layer "VOUT_L01_P036" (solid, pour order 36): 5690,880 5685,885 5685,1105 5980,1105 5980,895 5970,885
GND on Top Layer "GND_L01_P026" (solid, pour order 26): 20,1450 25,1455 255,1455 255,1285 230,1260 25,1260 20,1265
V_IN on Top Layer "V_IN_L01_P024" (solid, pour order 24): 10,1860 170,1860 170,1675 165,1680 10,1680
GND on Ground (split plane): 5979.9,20.1 20.1,20.1 20.1,3014.9 5979.9,3014.9
no net on Layer 2 (split plane): 5979.9,20.1 20.1,20.1 20.1,3014.9 5979.9,3014.9

## Silkscreen, mask and mechanical layers (free items; w line width, h text height)
Top Overlay:
  text "V_IN" at 20,1910 h60
  text "GND" at 45,1490 h60
  text "V_OUT" at 5655,1125 h60
  text "GND" at 5800,790 h60

## Text inside footprints (layer, text, board x,y; h text height)
SW2: Top 3D Body "*" at 3450,1499.5 h50 r270; Top 3D Body "ON" at 3570,1248 h50 r270; Top 3D Body "OFF" at 3570,1534.5 h50 r270; Top 3D Body "RefDes2" at 3300,1447.5 h50 r270; Top Overlay "*" at 3506,1522.5 h50 r270; Top Overlay "ON" at 3570,1248 h50 r270; Top Overlay "OFF" at 3570,1534.5 h50 r270; Top Overlay "RefDes" at 3300,1435 h50 r270; Top Overlay "REFDES" at 3300,1447.5 h50 r270
U1: Top 3D Body "*" at 1376.63,1276.53 h50 r90; Top Overlay "*" at 1376.63,1219.53 h50 r90
U3: Top 3D Body "*" at 192.5,659 h50; Top Overlay "*" at 142.5,595 h50
U4: Top 3D Body "*" at 582.5,1442 h50; Top Overlay "*" at 580,1443 h50